# Altium PCB DB_2.PcbDoc (part 2 of 2)
Units mil, origin at the board's own origin, x right, y up, seen from the top; angles counter-clockwise.
Board outline 1675 x 1950 mil, 4 copper layers (Top Layer, Signal Layer 1, Ground, Bottom Layer), stack 30.634 mil thick; 76 components, 70 nets, 293 pads, 58 vias.
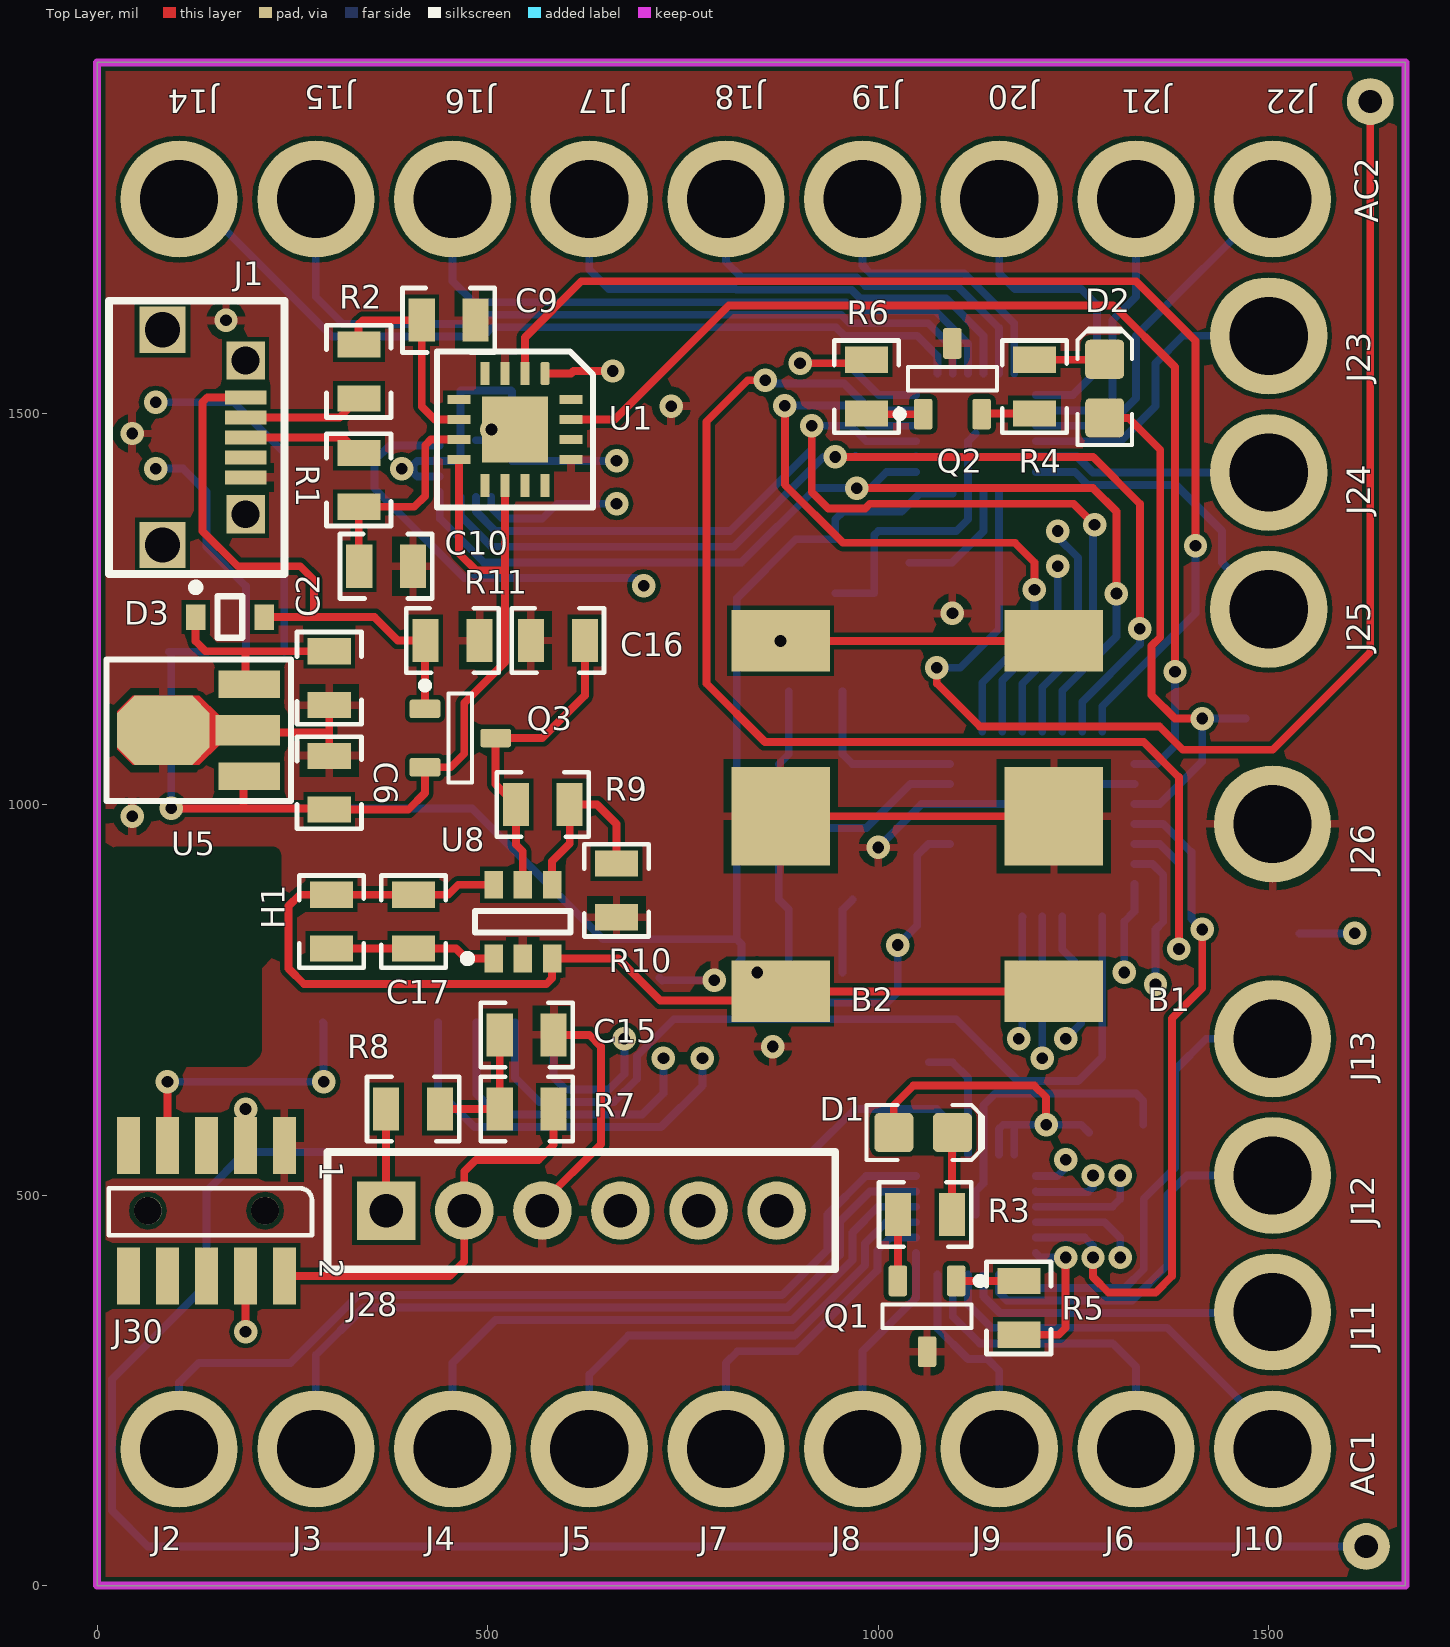
[diagram p0: Top Layer view]

## Via types
v1: diameter 30, hole 15, Top Layer to Bottom Layer, 58 vias

## Nets (pads, with @x,y where several pads share a name; then routed paths per layer and width w, separated by ;. In a path a pad name is that pad's centre, name@x,y a point inside that pad or via, vN(x,y) a via of type N, cw(c..) or ccw(c..) an arc to the next point about the centre after c; other vN are vias at no path point)
3.3V: C1.1 C4.1 C6.1 C11.2 C12.2 C13.1 C14.1 D1.A D2.A J28.2 J30.2 Q3.3 R7.2 U1.1 U1.8 U1.10 U2.11 U2.12 U3.11 U3.12 U4.3 U4.17 U5.1 U6.2 U6.3 U6.20 U7.2 U7.3 U7.5 U7.8 | length 9388.5
  Top Layer w10: v1(95,995) 190,995 ; U5.1@187.4,1033.23 187.4,997.6 190,995 ; J30.2 451.18,396.18 470,415 J28.2 470,530 485,545 565,545 584.45,564.45 R7.2 ; U1.8 463.15,1321.85 485,1300 522.2,1300 ; U1.10 522.2,1300 ; U1.1 606.85,1551.85 610,1555 v1(660,1555) ; D1.A 1020,615 1045,640 1200,640 1215,625 v1(1215,590) ; D2.A 1320,1495 1361,1454 1361,1214.23 1350,1203.23 1350,1140 1380,1110 v1(1415,1110) ; 190,995 295.55,995 C6.1 398.39,993.39 419.72,1014.72 Q3.3 452.6,1047.6 470,1065 470,1130 522.2,1182.2 522.2,1300
  Ground w10: v1(390,1430) 390,1485 460,1555 v1(660,1555) 660,1580 700,1620 965,1620 1040,1545 1040,835 v1(1025,820) ; J28.2 470,735 555,820 v1(1025,820) ; v1(1415,1110) 1360,1110 1070,820 v1(1025,820) ; v1(1610,835) 1480,835 1375,730 1375,655 1310,590 v1(1215,590) 1100,590 1025,665 v1(1025,820)
  Bottom Layer w10: U6.3 U6.2 95,1192.52 v1(95,995) 480,995 647.64,827.36 U6.20 818.78,827.36 ; v1(390,1430) 400,1430 405,1425 ; U7.2 438.58,1420 410,1420 405,1425 ; U7.8 531.26,1528.74 C11.2 465.63,1530 C12.2 U7.5 465.32,1440.32 464.84,1439.84 U7.3 409.84,1439.84 405,1435 405,1425 ; U4.3 1064.41,949.41 1050,935 1050,845 v1(1025,820) 1025,760 1011.44,746.44 837.7,746.44 819,765.14 819,795.77 825,801.77 825,821.15 818.78,827.36 ; U3.11 U3.12 1053.23,1398.23 1030,1375 955,1375 945,1365 C1.1 894.45,1339.45 818.78,1263.78 818.78,827.36 ; U2.11 1154.53,584.53 1160,590 1174.21,590 ; U2.12 1174.21,590 ; C4.1@1270,580 1260,590 v1(1215,590) 1174.21,590 ; U4.17 1360.59,1000.59 1415,1055 v1(1415,1110) C14.1 ; C13.1 v1(1610,835)
3.3V_BAT: C16.1 Q3.2 R9.1 U8.5 | length 409.6
  Top Layer w10: U8.5 545,940 536.1,948.9 R9.1 510,1026.1 510,1084.72 Q3.2 570,1085 624.45,1139.45 C16.1
A_INT1: U4.20 U7.4 | length 1893.9
  Signal Layer 1 w10: v1(700,1280) 700,820 790,730 1340,730 1355,745 v1(1355,770)
  Bottom Layer w10: U7.4 374.53,1459.53 355,1440 355,1405 470,1290 690,1290 v1(700,1280) ; U4.20 1351.18,923.82 1365,910 1365,850 1355,840 v1(1355,770)
A_INT2: U4.21 U7.9 | length 1548.6
  Signal Layer 1 w10: v1(665,1440) 625,1440 605,1420 605,1360 645,1320 845,1320 910,1255 910,880 1005,785 v1(1315,785)
  Bottom Layer w10: U7.9 664.84,1439.84 v1(665,1440) ; v1(1315,785) 1315,850 1328.11,863.11 U4.21
B_V: B1.2 B2.2 C17.1 H1.2 U8.3 U8.6 | length 2184.5
  Top Layer w10: U8.6 462.24,897.24 449.45,884.45 C17.1 H1.2 259.45,884.45 245,870 245,790 265,770 575,770 582.4,777.4 U8.3 667.24,802.76 721,749 840.39,749 851.98,760.59 875,760.59 B1.2@1225,760.59 ; v1(875,1209.41) B1.2@1225,1209.41
  Signal Layer 1 w10: v1(845,785) 845,1080 875,1110 v1(875,1209.41)
CLK_IN: C7.1 T1.1 U4.6 | length 416.7
  Bottom Layer w10: C7.1 885.55,865.59 T1.1 872.76,942.76 900,970 985,970 1041.18,1026.18 U4.6
CLK_OUT: C8.1 T1.3 U4.7 | length 223.4
  Bottom Layer w10: C8.1 954.45,1064.41 T1.3 967.4,1051.77 U4.7
CS1: U2.16 U4.9 | length 1444.6
  Signal Layer 1 w10: v1(1230,1305) 1230,1100 1455,875 1455,800.3 1375,720.3 1375,445 1350,420 v1(1310,420)
  Bottom Layer w10: U4.9 1158.82,1158.82 1230,1230 v1(1230,1305) ; U2.16 1289.84,465.16 1310,445 v1(1310,420)
CS2: U3.16 U4.8 | length 885
  Top Layer w10: v1(880.5,1510.5) 880.5,1409.5 955,1335 1175,1335 1200,1310 v1(1200,1275)
  Bottom Layer w10: v1(880.5,1510.5) 881,1511 961.63,1511 987.63,1485 1000,1485 1000.16,1484.84 U3.16 ; U4.8 1133.23,1155.86 1200,1222.63 v1(1200,1275)
CS3: U4.10 U7.12 | length 1064.2
  Signal Layer 1 w10: v1(665,1385) 900,1385 935,1350 v1(1230,1350)
  Bottom Layer w10: U7.12 504.68,1380.32 519,1366 570,1366 589,1385 v1(665,1385) ; U4.10 1184.41,1154.41 1256,1226 1256,1315.77 1230,1341.77 v1(1230,1350)
CS_BLE: U4.22 U6.24 | length 1122.4
  Bottom Layer w10: U6.24 534.96,650.04 566,619 661.63,619 691,648.37 691,677.77 738.23,725 1100,725 1179,646 1256,646 1286.77,676.77 U4.22
GND: B1.1 B2.1 C1.2 C2.2 C3.2 C4.2 C5.2 C6.2 C7.2 C8.2 C9.1 C10.1 C11.1 C12.1 C13.2 C14.2 C15.2 C16.2 J1.5 J26.1 J28.3 J30.1 Q1.2 Q2.2 R10.2 R11.1 T1.2 U1.3 U1.13 U1.17 U2.10 U2.25 U3.10 U3.25 U4.5 U4.16 U4.29 U5.2 U6.1 U6.10 U6.21 U6.30 U7.6 U7.7 U8.2 | length 2285.1
  Top Layer w10: U5.2@185.43,1092.28 297.17,1092.28 ; C6.2 297.17,1092.28 ; C2.2 297.17,1092.28 ; J28.3 570,490 645,565 645,690 630,705 C15.2 ; B2.1 B1.1
  Bottom Layer w10: U7.6 495,1466.42 ; U7.7 495,1466.42 ; v1(505,1480) 508.58,1480 495,1466.42 ; U6.21 723.54,774.61 723.93,775 v1(790,775) ; T1.2@872.76,1051.61 885.55,1064.41 C8.2 ; C1.2 995,1270.55 995,1345 1000,1350 1100,1350 1115.16,1365.16 U3.10 1115.16,1465.16 U3.25 ; C7.2 954.45,865.59 T1.2@967.24,878.39 ; v1(1000,945) 1055.59,1000.59 U4.5 1184.41,1000.59 U4.29 1261.18,1026.18 U4.16 ; U2.25 1125,505 1134.84,514.84 U2.10 1134.84,614.84 1150,630 1330,630 1339.45,620.55 C4.2
  other v1: 865,690 45,985 1095,1245 45,1475 735,1510 165,1620
ICSPCLK: J28.5 U4.24 | length 818.4
  Signal Layer 1 w10: J28.5 770,570 832.5,632.5 1222.5,632.5 1240,650 v1(1240,700)
  Bottom Layer w10: U4.24 1235.59,814.41 1260,790 1260,720 v1(1240,700)
ICSPDAT: J28.4 U4.25 | length 858.3
  Signal Layer 1 w10: J28.4 670,575 695,600 777.37,600 825.87,648.5 1183.5,648.5 v1(1210,675)
  Bottom Layer w10: v1(1210,675) U4.25
INT_1: U2.17 U4.18 | length 888.3
  Top Layer w10: v1(1275,420) 1275,395 1295,375 1355,375 1376,396 1376,726 1415,765 v1(1415,840)
  Bottom Layer w10: U2.17 1264.53,445.47 1275,435 v1(1275,420) ; U4.18 1365,975 1401,939 1401,854 v1(1415,840)
INT_2: U3.17 U4.19 | length 1693
  Top Layer w10: v1(855.22,1543.19) 833.19,1543.19 780,1490 780,1155 855,1080 1340,1080 1385,1035 v1(1385,815)
  Bottom Layer w10: v1(855.22,1543.19) 859.41,1539 956.25,1539 990.73,1504.53 U3.17 ; U4.19 1360.59,949.41 1385,925 v1(1385,815)
MCLR: J28.1 R8.1 U4.26 | length 1258.1
  Top Layer w10: J28.1 R8.1
  Signal Layer 1 w10: J28.1 370,570 420,620 774.75,620 819.25,664.5 1154.5,664.5 1180,690 v1(1180,700)
  Bottom Layer w10: v1(1180,700) 1184.41,695.59 U4.26 U4.26@1185,856.3
MISO: U2.13 U3.13 U4.12 U6.26 U7.1 | length 4849.5
  Top Layer w10: v1(972.5,1405) 1275,1405 1305,1375 v1(1305,1270)
  Signal Layer 1 w10: v1(972.5,1405) 755,1405 692,1468 613,1468 580,1435 580,1345 660,1265 660,820 775,705 v1(775,675) 775,660 751,636 396,636 305,545 305,430 330,405 880,405 1020,545 v1(1240,545)
  Bottom Layer w10: U6.26 436.54,633.46 483,587 722,587 775,640 v1(775,675) ; U7.1 438.74,1366.26 495,1310 825,1310 920,1405 v1(972.5,1405) 990,1405 1010.79,1425.79 U3.13 ; U2.13 1229.21,524.21 1240,535 v1(1240,545) ; U4.12 1235.59,1145.59 1305,1215 v1(1305,1270)
MOSI: U2.14 U3.14 U4.13 U6.25 U7.14 | length 4864.3
  Top Layer w10: v1(945,1445) 1275,1445 1335,1385 v1(1335,1225)
  Signal Layer 1 w10: v1(945,1445) 925,1425 757.63,1425 698.63,1484 606.37,1484 564,1441.63 564,1338.37 644,1258.37 644,806 725,725 v1(725,675) 725,660 717,652 389.37,652 289,551.63 289,423.37 332.37,380 890,380 1000,490 1260,490 1275,505 v1(1275,525)
  Bottom Layer w10: U7.14 465.32,1369.68 505,1330 815,1330 930,1445 v1(945,1445) 970,1445 ; U6.25 485.75,629.25 512,603 698,603 725,630 v1(725,675) ; U3.14 1047.76,1445 971,1445 ; U2.14 1202.3,504 1269,504 1275,510 v1(1275,525) ; U4.13 1261.18,1131.18 1335,1205 v1(1335,1225) ; 970,1445 971,1445 ; 970,1445 971,1446 971,1445
NetAC1_1: AC1.1 U2.8 | length 3129.4
  Bottom Layer w10: U2.8 1095.47,589.53 1075,610 970,610 915,555 190,555 140,505 140,385 19,264 19,96 65,50 AC1.1
NetAC2_1: AC2.1 U3.8 | length 1640.7
  Top Layer w10: v1(1075,1175) 1075,1155 1130,1100 1360,1100 1390,1070 1505,1070 1630,1195 AC2.1
  Bottom Layer w10: v1(1075,1175) 1105,1175 1154.53,1224.53 U3.8
NetC2_1: C2.1 D3.1 U5.3 | length 253.4
  Top Layer w10: D3.1 126.1,1208.9 138.82,1196.18 190,1196.18 ; U5.3@187.4,1151.34 190,1153.94 190,1196.18 ; C2.1 190,1196.18
NetC3_1: C3.1 U2.9 | length 156.6
  Bottom Layer w10: C3.1 1095,670 1115.16,649.84 U2.9
NetC5_1: C5.1 U3.9 | length 160.2
  Bottom Layer w10: C5.1 1094.45,1309.45 1134.84,1349.84 U3.9 U3.9@1135,1398.07
NetC9_2: C9.2 R2.2 U1.6 | length 274.2
  Top Layer w10: R2.2 334.45,1589.45 334.45,1614.45 340,1620 C9.2 415.55,1509.45 432.2,1492.8 U1.6
NetC10_2: C10.2 R1.2 U1.7 | length 263.5
  Top Layer w10: C10.2@335,1319.45 R1.2 406.1,1381.1 420,1395 420,1460 427.2,1467.2 U1.7
NetC15_1: C15.1 R7.1 R8.2 | length 171.7
  Top Layer w10: R8.2 R7.1 C15.1
NetC17_2: C17.2 H1.1 U8.1 | length 212.9
  Top Layer w10: H1.1 C17.2 459.45,815.55 472.24,802.76 U8.1
NetD1_K: D1.K R3.2 | length 105.2
  Top Layer w10: R3.2 1094.45,579.45 D1.K
NetD2_K: D2.K R4.2 | length 90.2
  Top Layer w10: R4.2 1289.45,1569.45 D2.K
NetJ1_2: J1.2 R2.1 | length 155.1
  Top Layer w10: J1.2 310.59,1495.59 R2.1
NetJ1_3: J1.3 R1.1 | length 153.3
  Top Layer w10: J1.3 315,1470 R1.1
NetQ1_1: Q1.1 R5.1 | length 80
  Top Layer w10: Q1.1 R5.1
NetQ1_3: Q1.3 R3.1 | length 85.1
  Top Layer w10: Q1.3 1025.2,474.65 R3.1
NetQ2_1: Q2.1 R6.2 | length 72.9
  Top Layer w10: R6.2 985.83,1499.72 Q2.1
NetQ2_3: Q2.3 R4.1 | length 67.9
  Top Layer w10: Q2.3 1133.23,1500.55 R4.1
NetR5_2: R5.2 U2.18 | length 194.3
  Top Layer w10: R5.2 1231.1,321.1 1240,330 v1(1240,420)
  Bottom Layer w10: U2.18 1207.56,420 v1(1240,420)
NetR6_1: R6.1 U3.18 | length 245.7
  Top Layer w10: v1(900,1565) R6.1@980.55,1565
  Bottom Layer w10: v1(900,1565) 960,1565 1000.79,1524.21 U3.18
NetR9_2: R9.2 R10.1 U8.4 | length 233
  Top Layer w10: U8.4 582.4,927.4 605,950 R9.2 640,1000 665,975 R10.1
P2_1: J30.4 U6.5 | length 1914.8
  Top Layer w10: v1(190,325) J30.4
  Signal Layer 1 w10: v1(75,1515) 215,1515 280,1450 280,700 250,670 250,625 186.28,561.28 186.28,328.72 v1(190,325)
  Bottom Layer w10: v1(75,1515) 175,1515 239.68,1450.32 U6.5
P2_2: J30.3 U6.4 | length 1343.7
  Top Layer w10: J30.3 v1(190,610)
  Signal Layer 1 w10: v1(75,1430) 215,1430 244,1401 244,699 190,645 v1(190,610)
  Bottom Layer w10: v1(75,1430) 110,1430 140,1400 140,1330 190.47,1279.53 U6.4
RESET: J30.7 U6.29 | length 358
  Top Layer w10: J30.7 v1(90,645)
  Bottom Layer w10: v1(90,645) v1(290,645) 290,719.96 U6.29
RX: U1.15 U4.15 | length 1412.9
  Top Layer w10: U1.15 662.8,1492.8 809,1639 1301,1639 1380,1560 v1(1380,1170)
  Bottom Layer w10: U4.15 1356.77,1051.77 1380,1075 v1(1380,1170)
S1: J13.1 U2.19 | length 596
  Bottom Layer w10: U2.19 1191.44,381 1316,381 1340,405 1340,495 1380,535 1380,660 1420,700 J13.1
S2: J12.1 U2.20 | length 496.6
  Bottom Layer w10: U2.20 1154.53,375.47 1165,365 1325,365 1370,410 1370,500 1395,525 J12.1
S3: J11.1 U2.21 | length 407.4
  Bottom Layer w10: U2.21 1134.84,370.16 1156,349 1504,349 J11.1
S4: J10.1 U2.22 | length 516.5
  Bottom Layer w10: U2.22 1115.16,359.84 1145,330 1370,330 1505,195 J10.1
S5: J6.1 U2.23 | length 420
  Bottom Layer w10: U2.23 1095.47,344.53 1130,310 1300,310 1330,280 J6.1
S6: J9.1 U2.24 | length 270.7
  Bottom Layer w10: U2.24 1075.79,329.21 1115,290 1140,290 1155,275 J9.1
S7: J8.1 U2.1 | length 279
  Bottom Layer w10: J8.1 980,300 1048.23,368.23 U2.1
S8: J7.1 U2.2 | length 434.6
  Bottom Layer w10: J7.1 805,285 820,300 895.51,300 999,403.49 999,429 1015.47,445.47 U2.2
S9: J5.1 U2.3 | length 610.4
  Bottom Layer w10: J5.1 630,270 680,320 892.88,320 983,410.12 983,438 1010.16,465.16 U2.3
S10: J4.1 U2.4 | length 806.7
  Bottom Layer w10: J4.1 455,285 510,340 890.25,340 967,416.75 967,452 999.84,484.84 U2.4
S11: J3.1 U2.5 | length 1000
  Bottom Layer w10: J3.1 280,295 341,356 883.63,356 951,423.37 951,466 989.53,504.53 U2.5
S12: J2.1 U2.6 | length 1164.4
  Bottom Layer w10: J2.1 105,260 130,285 247.37,285 334.37,372 877,372 935,430 935,475 984.21,524.21 U2.6
S13: J14.1 U3.19 | length 1086.3
  Bottom Layer w10: J14.1 125,1775 301,1599 494,1599 506,1611 945.86,1611 956.86,1600 1050,1600 1075.79,1574.21 U3.19
S14: J15.1 U3.20 | length 1010.3
  Bottom Layer w10: J15.1 280,1650 315,1615 487.37,1615 499.37,1627 952.49,1627 963.49,1616 1064,1616 1095.47,1584.53 U3.20
S15: J16.1 U3.21 | length 836.4
  Bottom Layer w10: J16.1 455,1670 482,1643 959.12,1643 970.12,1632 1073,1632 1115.16,1589.84 U3.21
S16: J17.1 U3.22 | length 678.4
  Bottom Layer w10: J17.1 630,1685 655,1660 817.37,1660 818.37,1659 965.75,1659 976.75,1648 1087,1648 1134.84,1600.16 U3.22
S17: J18.1 U3.23 | length 523.2
  Bottom Layer w10: J18.1 805,1695 825,1675 972.37,1675 983.37,1664 1101,1664 1154.53,1610.47 U3.23
S18: J19.1 U3.24 | length 374
  Bottom Layer w10: J19.1 980,1690 990,1680 1110,1680 1174.21,1615.79 U3.24
S19: J20.1 U3.1 | length 412.5
  Bottom Layer w10: J20.1 1155,1680 1175,1660 1260,1660 1280,1640 1280,1555 1249.21,1524.21 U3.1
S20: J21.1 U3.2 | length 375
  Bottom Layer w10: U3.2 1289.53,1504.53 1300,1515 1300,1620 1330,1650 J21.1
S21: J22.1 U3.3 | length 470.3
  Bottom Layer w10: U3.3 1294.84,1484.84 1330,1520 1330,1600 J22.1
S22: J23.1 U3.4 | length 386.3
  Bottom Layer w10: U3.4 1310.16,1465.16 1355,1510 1355,1565 1390,1600 J23.1
S23: J24.1 U3.5 | length 306.7
  Bottom Layer w10: U3.5 1254.53,1445.47 1275,1425 J24.1
S24: J25.1 U3.6 | length 394.6
  Bottom Layer w10: U3.6 1251.59,1425.79 1268.37,1409 1381.24,1409 1440.15,1350.09 1440.15,1309.85 J25.1
SCLK: U2.15 U3.15 U4.11 U6.23 U7.13 | length 4772.1
  Top Layer w10: v1(915,1485) 915,1400 936,1379 983.27,1379 989.27,1385 1250,1385 v1(1277,1358) v1@1274,1355
  Signal Layer 1 w10: v1(915,1485) 885,1455 750.25,1455 705.25,1500 599.75,1500 548,1448.25 548,1331.75 628,1251.75 628,799.37 675,752.37 v1(675,700) 675,685 658,668 382.75,668 273,558.25 273,416.75 325.75,364 896.63,364 997.63,465 1270,465 1310,505 v1(1310,525)
  Bottom Layer w10: U7.13 485,1375 510,1350 810,1350 915,1455 v1(915,1485) 965,1485 984.84,1465.16 U3.15 ; U6.23 584.17,650.83 600,635 655,635 675,655 v1(675,700) ; U2.15 1299.84,484.84 1310,495 v1(1310,525) ; U4.11 1210,1150 1275,1215 1275,1356 v1(1277,1358)
TX: U1.2 U4.14 | length 1516
  Top Layer w10: U1.2 547.8,1597.8 620,1670 1330,1670 1406.22,1593.78 v1(1406.22,1331.39)
  Bottom Layer w10: U4.14 1286.77,1125.56 1406.22,1245 v1(1406.22,1331.39)
V_USB: D3.2 J1.1 Q3.1 R11.2 | length 745.6
  Top Layer w10: J1.1 141.18,1521.18 135,1515 135,1350 180,1305 260,1305 277.8,1287.2 277.8,1240 ; D3.2 277.8,1240 ; Q3.1 419.72,1209.17 R11.2 385,1210 355,1240 277.8,1240
pads on no net: D1.0 D2.0 J1.4 J1.15 J1.16 J1.18 J28.6 J30.5 J30.6 J30.8 J30.9 J30.10 J30.21 J30.22 Q1.0 Q2.0 Q3.0 U1.4 U1.5 U1.9 U1.11 U1.12 U1.14 U1.16 U2.7 U3.7 U4.1 U4.2 U4.4 U4.23 U4.27 U4.28 U5.0 U6.6 U6.7 U6.8 U6.9 U6.11 U6.12 U6.13 U6.14 U6.15 U6.16 U6.17 U6.18 U6.19 U6.22 U6.27 U6.28 U7.10 U7.11

## Polygon pours and split planes (outlines as drawn)
GND on Bottom Layer "GND_Ground_Bottom" (solid, remove dead copper, pour order 14): 5,5 5,1945 1670,1945 1670,5
NetAC2_1 on Bottom Layer "AC_Shield_2" (solid, remove dead copper, pour order 12): 5,1945 5,1640 1185,1640 1185,1515 1410,1290 1410,1185 1440,1155 1670,1155 1670,1945
NetAC1_1 on Bottom Layer "AC_Shield_1" (solid, remove dead copper, pour order 8): 5,5 5,565 825,565 825,570 1405,570 1405,765 1670,765 1670,5
GND on Top Layer "Top_Layer_GND" (solid, remove dead copper, pour order 0): 5,5 5,1945 1670,1945 1670,5
GND on Signal Layer 1 "Signal_Layer_1_GND" (solid, remove dead copper, pour order 2): 5,5 5,1945 1670,1945 1670,5
GND on Ground "Ground_GND" (solid, remove dead copper, pour order 6): 5,5 5,1945 1670,1945 1670,5

## Keep-outs
Keep-Out Layer:
  the board outline again, w10

## Silkscreen, mask and mechanical layers (free items; w line width, h text height)
Mechanical 3:
  the board outline again, w10

## Text inside footprints (layer, text, board x,y; h text height)
J30: Top Overlay "1" at 285,543.5 h30 r270; Top Overlay "2" at 285,418.5 h30 r270